# EAGLE board 1f69b36a-fbd2-43c0-98fc-c2e039cf8966.g (EAGLE 7.0.0)

Size 125 x 125 mm. Coordinates in mm from the lower left corner, seen from the top.
Outline: 0,0 0,125 125,125 125,0 0,0
Copper layers (1*16): Top 0.035mm / dielectric 1.5mm / Bottom 0.035mm
Design rules "default": minimum track width 10mil, minimum drill 0.6mm, track to track 8mil, track to pad 8mil, pad to pad 8mil, via to via 8mil, smd to smd 8mil, copper to edge 40mil, drill to drill 8mil, minimum pad ring 10mil, minimum via ring 8mil, stop-mask expansion 4mil, vias tented up to drill 0mil, thermal gap 10mil

## Footprints (pad centres in the part's own frame; a part is rotated, then mirrored left to right if it is on the bottom)
BUTTON-TACTILE-ROUND-ADAFRUIT1009 = drill 1.5 square: P -6,2.5 | drill 1.5: P2 6,2.5; S -6,-2.5; S2 6,-2.5 | hole 1.4: 0,-4.5; 0,4.5
BATTERY_9V_KEYSTONE_968 = drill 2.2: N 6.35,0 | drill 2.2 octagon: P -6.35,0
SPARKFUN_DUAL_MOTOR_DRIVER = drill 1.016 pad 1.88 long: A01 7.62,1.27; A02 7.62,-1.27; AIN1 -7.62,3.81; AIN2 -7.62,6.35; B01 7.62,-6.35; B02 7.62,-3.81; BIN1 -7.62,-1.27; BIN2 -7.62,-3.81; GND -7.62,-8.89; GND1 7.62,3.81; GND2 7.62,-8.89; PWMA -7.62,8.89; PWMB -7.62,-6.35; STBY -7.62,1.27; VCC 7.62,6.35; VM 7.62,8.89
TO220H = drill 1.118 long: 1 -2.54,-10.16; 2 0,-10.16; 3 2.54,-10.16 | hole 3.302: 0,4.826
SOLARBOTICS_G2_LEFT = drill 1.27 long: + -40.545,-3.68; - -43.45,-3.68 | hole 3: -25.1,-10.2; -25.1,3.6
LED5MM = drill 0.9 pad 1.676 square: A -1.27,0 | drill 0.9 pad 1.676: K 1.27,0
SOLARBOTICS_G2 = drill 1.27 long: + 40.545,-3.68; - 42.815,-3.68 | hole 3: 25.1,-10.2; 25.1,3.6
RPI-ZERO-EDGE-RIGHT-ANGLE = drill 1 square: P$1 -24.13,-1.27 | drill 1: P$2 -24.13,1.27; P$3 -21.59,-1.27; P$4 -21.59,1.27; P$5 -19.05,-1.27; P$6 -19.05,1.27; P$7 -16.51,-1.27; P$8 -16.51,1.27; P$9 -13.97,-1.27; P$10 -13.97,1.27; P$11 -11.43,-1.27; P$12 -11.43,1.27; P$13 -8.89,-1.27; P$14 -8.89,1.27; P$15 -6.35,-1.27; P$16 -6.35,1.27; P$17 -3.81,-1.27; P$18 -3.81,1.27; P$19 -1.27,-1.27; P$20 -1.27,1.27; P$21 1.27,-1.27; P$22 1.27,1.27; P$23 3.81,-1.27; P$24 3.81,1.27; P$25 6.35,-1.27; P$26 6.35,1.27; P$27 8.89,-1.27; P$28 8.89,1.27; P$29 11.43,-1.27; P$30 11.43,1.27; P$31 13.97,-1.27; P$32 13.97,1.27; P$33 16.51,-1.27; P$34 16.51,1.27; P$35 19.05,-1.27; P$36 19.05,1.27; P$37 21.59,-1.27; P$38 21.59,1.27; P$39 24.13,-1.27; P$40 24.13,1.27
ADAFRUIT-3/4IN-CASTER = hole 2: -7.62,0; 7.62,0
BUMP_SWITCH_OMRON_D2FLA = drill 1.3 square: A 5.08,-2.8 | drill 1.3: B 0,-2.8; NC -5.08,-2.8
BUMP_SWITCH_OMRON_D2FLA1 = drill 1.3 square: A -5.08,-2.8 | drill 1.3: B 0,-2.8; NC 5.08,-2.8

## Placement (x,y rotation side)
B1_11_button  BUTTON-TACTILE-ROUND  [BUTTON-TACTILE-ROUND-ADAFRUIT1009]  32.5,90.33 0 top
B1_12_button_2  BUTTON-TACTILE-ROUND  [BUTTON-TACTILE-ROUND-ADAFRUIT1009]  92.5,90.33 0 top
BATT1_1_battery  BATTERY-9V-VERTICAL  [BATTERY_9V_KEYSTONE_968]  63.55,8.46 0 top
DRVR_2_drive  SPARKFUN_DUAL_MOTOR_DRIVER-BOB  [SPARKFUN_DUAL_MOTOR_DRIVER]  62.58,91.5 0 top
IC1_0_brain  78XX-VOLTAGE_REGULATORT  [TO220H]  62.5,62.5 0 top
L_2_drive  SOLARBOTICS_GM2_LEFT  [SOLARBOTICS_G2_LEFT]  141.21,48.09 0 top
LED1_6_led  [LED5MM]  12.5,92.5 0 top
LED1_7_led_2  [LED5MM]  17.5,102.5 0 top
LED1_13_led_3  [LED5MM]  27.5,109.5 0 top
LED1_14_led_4  [LED5MM]  112.5,92.5 0 top
LED1_15_led_5  [LED5MM]  107.5,102.5 0 top
LED1_16_led_6  [LED5MM]  97.5,109.5 0 top
R_2_drive  SOLARBOTICS_GM2  [SOLARBOTICS_G2]  -16.36,48.01 0 top
U1_0_brain  RASPBERRY-PI  [RPI-ZERO-EDGE-RIGHT-ANGLE]  65.58,76 180 top
u1_5_caster  CASTERADAFRUIT-3/4IN  [ADAFRUIT-3/4IN-CASTER]  62.5,112.5 0 top
u1_10_penholder  PENHOLDER  [PENHOLDER]  62.99,34.64 0 top
U$2_3_bump  BUMP_SWITCH-MEDIUM-LEFT  [BUMP_SWITCH_OMRON_D2FLA]  117.43,124.99 0 top
U$2_4_bump_2  BUMP_SWITCH-MEDIUM-RIGHT  [BUMP_SWITCH_OMRON_D2FLA1]  7.69,125.18 0 top
U$2_8_bump_3  BUMP_SWITCH-MEDIUM-LEFT  [BUMP_SWITCH_OMRON_D2FLA]  7.57,0.01 180 top
U$2_9_bump_4  BUMP_SWITCH-MEDIUM-RIGHT  [BUMP_SWITCH_OMRON_D2FLA1]  117.32,-0.17 180 top

## Library data of the parts
B1_11_button = Components; DIST: Adafruit; DISTPN: 1009; HIERARCHY_NAME: button.B1
B1_12_button_2 = Components; DIST: Adafruit; DISTPN: 1009; HIERARCHY_NAME: button_2.B1
BATT1_1_battery = Components; HIERARCHY_NAME: battery.BATT1
DRVR_2_drive = BOBs; DIST: Sparkfun; DISTPN: 9457; HIERARCHY_NAME: drive.DRVR
IC1_0_brain = Components; DIST: Adafruit; DISTPN: 2164; HIERARCHY_NAME: brain.IC1
L_2_drive = Components; DIST: Solarbotics; DISTPN: gm2; HIERARCHY_NAME: drive.L
LED1_6_led = Components; DIST: Adafruit; DISTPN: 298; HIERARCHY_NAME: led.LED1
LED1_7_led_2 = Components; DIST: Adafruit; DISTPN: 298; HIERARCHY_NAME: led_2.LED1
LED1_13_led_3 = Components; DIST: Adafruit; DISTPN: 298; HIERARCHY_NAME: led_3.LED1
LED1_14_led_4 = Components; DIST: Adafruit; DISTPN: 298; HIERARCHY_NAME: led_4.LED1
LED1_15_led_5 = Components; DIST: Adafruit; DISTPN: 298; HIERARCHY_NAME: led_5.LED1
LED1_16_led_6 = Components; DIST: Adafruit; DISTPN: 298; HIERARCHY_NAME: led_6.LED1
R_2_drive = Components; DIST: Solarbotics; DISTPN: gm2; HIERARCHY_NAME: drive.R
U1_0_brain = BOBs; HIERARCHY_NAME: brain.U1
u1_5_caster = Components; DIST: Adafruit; DISTPN: 1200; HIERARCHY_NAME: caster.u1
u1_10_penholder = Components; HIERARCHY_NAME: penholder.u1
U$2_3_bump = Components; DIST: Digikey; DISTPN: SW843-ND; HIERARCHY_NAME: bump.U$2
U$2_4_bump_2 = Components; DIST: Digikey; DISTPN: SW842-ND; HIERARCHY_NAME: bump_2.U$2
U$2_8_bump_3 = Components; DIST: Digikey; DISTPN: SW843-ND; HIERARCHY_NAME: bump_3.U$2
U$2_9_bump_4 = Components; DIST: Digikey; DISTPN: SW842-ND; HIERARCHY_NAME: bump_4.U$2

## Nets
3V3_0_brain: U1_0_brain.P$1 U1_0_brain.P$17
5V_0_brain: DRVR_2_drive.VCC IC1_0_brain.3 U1_0_brain.P$2 U1_0_brain.P$4
!CE0!/GPIO8_0_brain: U1_0_brain.P$24 U$2_4_bump_2.A
!CE!/GPIO7_0_brain: U1_0_brain.P$26 U$2_3_bump.A
A01_2_drive: DRVR_2_drive.A01 R_2_drive.+
A02_2_drive: DRVR_2_drive.A02 R_2_drive.-
B01_2_drive: DRVR_2_drive.B01 L_2_drive.+
B02_2_drive: DRVR_2_drive.B02 L_2_drive.-
GEN4/GPIO23_0_brain: U1_0_brain.P$16
GEN5/GPIO24_0_brain: U1_0_brain.P$18
GEN/6GPIO25_0_brain: U1_0_brain.P$22
GND_0_brain: B1_11_button.S B1_12_button_2.S BATT1_1_battery.N DRVR_2_drive.GND DRVR_2_drive.GND1 DRVR_2_drive.GND2 IC1_0_brain.2 U1_0_brain.P$6 U1_0_brain.P$9 U1_0_brain.P$14 U1_0_brain.P$20 U1_0_brain.P$25 U1_0_brain.P$30 U1_0_brain.P$34 U1_0_brain.P$39 U$2_3_bump.B U$2_4_bump_2.B U$2_8_bump_3.B U$2_9_bump_4.B
GPIO2/SDA1_0_brain: DRVR_2_drive.STBY U1_0_brain.P$3
GPIO3/SCL1_0_brain: DRVR_2_drive.AIN1 U1_0_brain.P$5
GPIO4/GCKL_0_brain: DRVR_2_drive.AIN2 U1_0_brain.P$7
GPIO5_0_brain: DRVR_2_drive.BIN1 U1_0_brain.P$29
GPIO6_0_brain: DRVR_2_drive.BIN2 U1_0_brain.P$31
GPIO9/MISO_0_brain: LED1_6_led.A U1_0_brain.P$21
GPIO10/MOSI_0_brain: LED1_7_led_2.A U1_0_brain.P$19
GPIO11/SCLK_0_brain: U1_0_brain.P$23 U$2_8_bump_3.A
GPIO12_0_brain: DRVR_2_drive.PWMA U1_0_brain.P$32
GPIO13_0_brain: DRVR_2_drive.PWMB U1_0_brain.P$33
GPIO16_0_brain: B1_12_button_2.P U1_0_brain.P$36
GPIO17/GEN0_0_brain: LED1_13_led_3.A U1_0_brain.P$11
GPIO18_0_brain: LED1_14_led_4.A U1_0_brain.P$12
GPIO19_0_brain: LED1_15_led_5.A U1_0_brain.P$35
GPIO20_0_brain: LED1_16_led_6.A U1_0_brain.P$38
GPIO21_0_brain: U1_0_brain.P$40
GPIO22/GEN3_0_brain: U1_0_brain.P$15
GPIO26_0_brain: U1_0_brain.P$37
GPIO27/GEN2_0_brain: U1_0_brain.P$13
N$1_1_battery: BATT1_1_battery.P
N$1_6_led: LED1_6_led.K
N$1_7_led_2: LED1_7_led_2.K
N$1_13_led_3: LED1_13_led_3.K
N$1_14_led_4: LED1_14_led_4.K
N$1_15_led_5: LED1_15_led_5.K
N$1_16_led_6: LED1_16_led_6.K
POS_1_battery: DRVR_2_drive.VM
RXD0/GPIO15_0_brain: B1_11_button.P U1_0_brain.P$10
TXD0/GPIO14_0_brain: U1_0_brain.P$8 U$2_9_bump_4.A
VBAT_0_brain: IC1_0_brain.1